# Altium PCB Board.PcbDoc
Units mil, origin at the board's own origin, x right, y up, seen from the top; angles counter-clockwise.
Board outline 5535.2 x 1035.2 mil, 2 copper layers (Top Layer, Bottom Layer); 64 components, 52 nets, 197 pads, 38 vias.
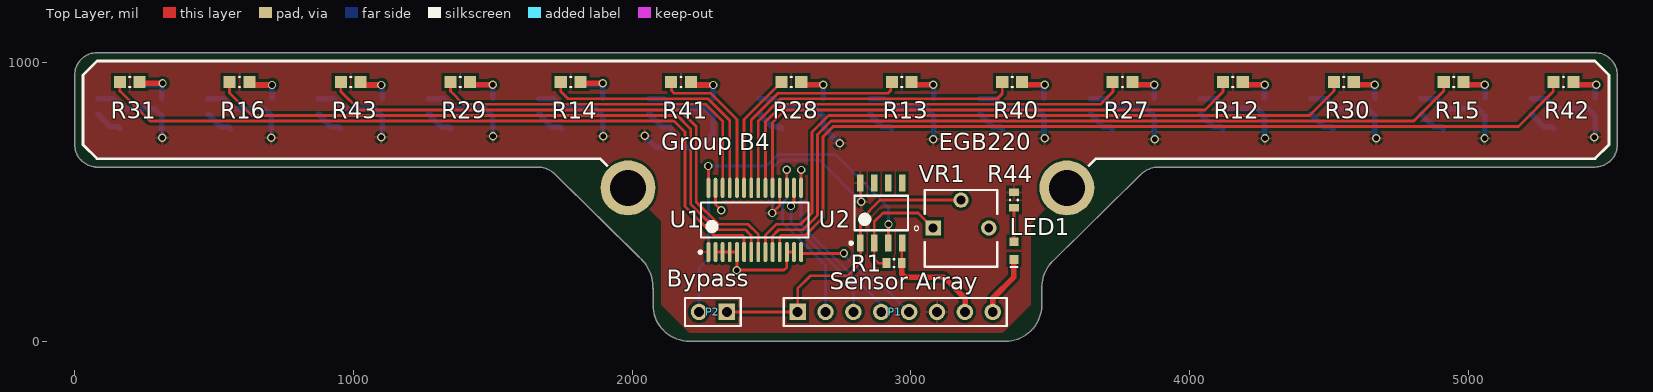
[diagram p0: Top Layer view]
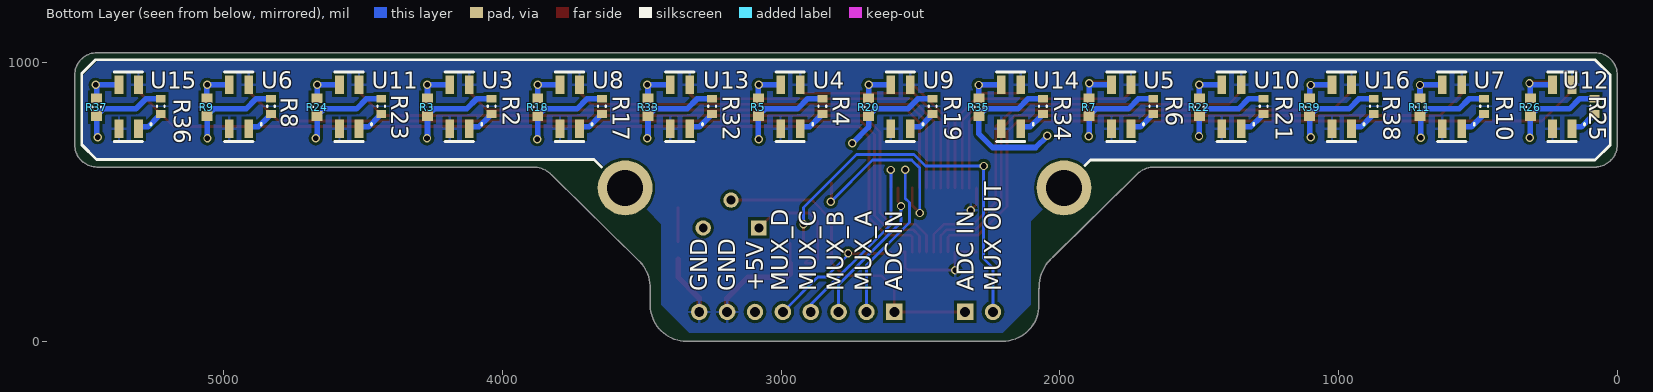
[diagram p1: Bottom Layer view, seen from below]

## Layer stack, top to bottom
Top Solder: solder mask 0.4, Solder Resist, Dk 3.5
Top Layer: signal copper 1.4
Dielectric 1: dielectric 12.6, FR-4, Dk 4.8
Bottom Layer: signal copper 1.4
Bottom Solder: solder mask 0.4, Solder Resist, Dk 3.5

## Board outline
1726.34,596.29 1726.36,596.28 cw(c1729.86,599.87) 1726.21,596.43 ccw(c1660,533.95) 1726.19,596.45 ccw(c1660,533.95) 1660,624.98 cw(c1660,630) 1659.6,625 75.18,625 cw(c75.18,630.01) 73.54,625.28 cw(c80.18,705.01) 0.44,698.37 cw(c5.18,700.01) 0.17,700.01 0.17,953.73 cw(c5.01,955.01) 0,955.01 cw(c80.18,955.01) 80.18,1035.2 cw(c80.18,1030.18) 81.46,1035.03 5455.18,1035.03 cw(c5455.18,955.01) 5535.2,955.01 5535.2,705.01 cw(c5455.18,705.01) 5455.18,625 3890.39,625 cw(c3890,630) 3890,624.99 ccw(c3890,533.95) 3824.02,596.67 cw(c3820.39,600.13) 3822.83,595.75 3508.52,286.43 cw(c3505,290) 3507.98,285.97 ccw(c3605.46,192.59) 3470.65,199.56 3470.65,185.62 ccw(c3605.46,192.59) 3470.67,185.32 cw(c3465.66,185.05) 3470.67,185.05 cw(c3465.66,185.05) 3470.65,184.57 3470.65,130.01 cw(c3465.64,130.01) 3470.18,127.89 cw(c3340.18,130.01) 3340.18,0 2205.18,0 cw(c2205.18,130.01) 2075.17,130.01 2075.1,188.94 cw(c2080,190) 2074.99,190.13 ccw(c1933.05,193.71) 2075.03,193.71 ccw(c1933.05,193.71) 2026.31,300.77 cw(c2029.61,304.55) 2025.59,301.55 1726.36,596.28 1726.34,596.29 cw(c1729.86,599.87)

## Design rules (kind name [scope] priority, off if disabled: settings)
Clearance [All] p1: gap=10 ignorepadtopadclearanceinfootprint=FALSE except(0: Arc-Hole Track-Hole SMDPad-Hole THPad-Hole Via-Hole Fill-Hole Poly-Hole Region-Hole Text-Hole)
PolygonConnect [All] p1: connectstyle=Relief reliefconductorwidth=10 reliefentries=4 polygonreliefangle="90 Angle" airgapwidth=10
RoutingVias [All] p1: holewidth=20 width=30 viastyle="Through Hole" minholewidth=20 minwidth=30 maxholewidth=20 maxwidth=30
SolderMaskExpansion [All] p1: expansion=4
Width [All] p1: maxlimit=40 minlimit=10 preferedwidth=20 minimp=50.000000 maximp=50.000000 favimp=50.000000
30 further rules are at their usual default settings.

## Classes and differential pairs
component class Sensors: R2 R3 R4 R5 R6 R7 R8 R9 R10 R11 R12 R13 R14 R15 R16 R17 R18 R19 R20 R21 R22 R23 R24 R25 R26 R27 R28 R29 R30 R31 R32 R33 R34 R35 R36 R37 R38 R39 R40 R41 R42 R43 U3 U4 U5 U6 U7 U8 U9 U10 U11 U12 U13 U14 U15 U16
component class Control: LED1 P1 R1 R44 U1 U2 VR1

## Components (designator, comment, footprint, x,y, rotation, side; value= is the part's Value field where it differs from the comment)
LED1 "2V 20mA 0603 Red" 0603_A 3370.18,325.01 r90 top
P1 "CONTROLBOARD" HDR1X8 2594.16,105.02 r0 top
P2 "AMP BYPASS" HDR1X2 2340.18,105.02 r180 top
R1 "6K2 5% 0603(1608)" RESC0603(1608)_L 2940.18,280.01 r180 top value="6200.00 Ohm"
R2 "200R 5%" RESC0603(1608)_L 4039.42,842.57 r90 bottom value="200.00 Ohm"
R3 "22R 5%" RESC0603(1608)_N 4269.42,840.13 r270 bottom value="22.00 Ohm"
R4 "200R 5%" RESC0603(1608)_L 2852.27,842.57 r90 bottom value="200.00 Ohm"
R5 "22R 5%" RESC0603(1608)_N 3082.27,840.13 r270 bottom value="22.00 Ohm"
R6 "200R 5%" RESC0603(1608)_L 1665.12,842.57 r90 bottom value="200.00 Ohm"
R7 "22R 5%" RESC0603(1608)_N 1895.12,840.13 r270 bottom value="22.00 Ohm"
R8 "200R 5%" RESC0603(1608)_L 4830.85,842.57 r90 bottom value="200.00 Ohm"
R9 "22R 5%" RESC0603(1608)_N 5060.85,840.13 r270 bottom value="22.00 Ohm"
R10 "200R 5%" RESC0603(1608)_L 477.97,842.57 r90 bottom value="200.00 Ohm"
R11 "22R 5%" RESC0603(1608)_N 707.97,840.13 r270 bottom value="22.00 Ohm"
R12 "220R 5%" RESC0603(1608)_M 4155.87,930.02 r180 top value="220.00 Ohm"
R13 "220R 5%" RESC0603(1608)_M 2967.66,930.02 r180 top value="220.00 Ohm"
R14 "220R 5%" RESC0603(1608)_M 1779.46,930.02 r180 top value="220.00 Ohm"
R15 "220R 5%" RESC0603(1608)_M 4948.01,930.02 r180 top value="220.00 Ohm"
R16 "220R 5%" RESC0603(1608)_M 591.25,930.02 r180 top value="220.00 Ohm"
R17 "200R 5%" RESC0603(1608)_L 3643.7,842.57 r90 bottom value="200.00 Ohm"
R18 "22R 5%" RESC0603(1608)_N 3873.7,840.13 r270 bottom value="22.00 Ohm"
R19 "200R 5%" RESC0603(1608)_L 2456.55,842.57 r90 bottom value="200.00 Ohm"
R20 "22R 5%" RESC0603(1608)_N 2686.55,840.13 r270 bottom value="22.00 Ohm"
R21 "200R 5%" RESC0603(1608)_L 1269.4,842.57 r90 bottom value="200.00 Ohm"
R22 "22R 5%" RESC0603(1608)_N 1499.4,840.13 r270 bottom value="22.00 Ohm"
R23 "200R 5%" RESC0603(1608)_L 4435.14,842.57 r90 bottom value="200.00 Ohm"
R24 "22R 5%" RESC0603(1608)_N 4665.14,840.13 r270 bottom value="22.00 Ohm"
R25 "200R 5%" RESC0603(1608)_L 82.25,842.57 r90 bottom value="200.00 Ohm"
R26 "22R 5%" RESC0603(1608)_N 312.25,840.13 r270 bottom value="22.00 Ohm"
R27 "220R 5%" RESC0603(1608)_M 3759.8,930.02 r180 top value="220.00 Ohm"
R28 "220R 5%" RESC0603(1608)_M 2571.59,930.02 r180 top value="220.00 Ohm"
R29 "220R 5%" RESC0603(1608)_M 1383.39,930.02 r180 top value="220.00 Ohm"
R30 "220R 5%" RESC0603(1608)_M 4554.08,930.02 r180 top value="220.00 Ohm"
R31 "220R 5%" RESC0603(1608)_M 197.32,930.02 r180 top value="220.00 Ohm"
R32 "200R 5%" RESC0603(1608)_L 3247.99,842.57 r90 bottom value="200.00 Ohm"
R33 "22R 5%" RESC0603(1608)_N 3477.99,840.13 r270 bottom value="22.00 Ohm"
R34 "200R 5%" RESC0603(1608)_L 2060.84,842.57 r90 bottom value="200.00 Ohm"
R35 "22R 5%" RESC0603(1608)_N 2290.84,840.13 r270 bottom value="22.00 Ohm"
R36 "200R 5%" RESC0603(1608)_L 5226.57,842.57 r90 bottom value="200.00 Ohm"
R37 "22R 5%" RESC0603(1608)_N 5456.57,840.13 r270 bottom value="22.00 Ohm"
R38 "200R 5%" RESC0603(1608)_L 873.69,842.57 r90 bottom value="200.00 Ohm"
R39 "22R 5%" RESC0603(1608)_N 1103.69,840.13 r270 bottom value="22.00 Ohm"
R40 "220R 5%" RESC0603(1608)_M 3363.73,930.02 r180 top value="220.00 Ohm"
R41 "220R 5%" RESC0603(1608)_M 2175.53,930.02 r180 top value="220.00 Ohm"
R42 "220R 5%" RESC0603(1608)_M 5341.94,930.02 r180 top value="220.00 Ohm"
R43 "220R 5%" RESC0603(1608)_M 990.18,930.01 r180 top value="220.00 Ohm"
R44 "150R 5% 0603(1608)" RESC0603(1608)_L 3370.18,506.39 r90 top value="150.00 Ohm"
U1 "ADG706BRUZ-REEL" ADI-RU-28_M 2440.18,435.01 r90 top
U2 "LM358DR2G" ONSC-SOIC-8-751-07_V 2894.16,460.01 r90 top
U3 "QRE1113" QRE1113GR 4154.42,841.17 r270 bottom
U4 "QRE1113" QRE1113GR 2967.27,841.17 r270 bottom
U5 "QRE1113" QRE1113GR 1780.12,841.17 r270 bottom
U6 "QRE1113" QRE1113GR 4945.85,841.17 r270 bottom
U7 "QRE1113" QRE1113GR 592.97,841.17 r270 bottom
U8 "QRE1113" QRE1113GR 3758.7,841.17 r270 bottom
U9 "QRE1113" QRE1113GR 2571.55,841.17 r270 bottom
U10 "QRE1113" QRE1113GR 1384.4,841.17 r270 bottom
U11 "QRE1113" QRE1113GR 4550.14,841.17 r270 bottom
U12 "QRE1113" QRE1113GR 197.25,841.17 r270 bottom
U13 "QRE1113" QRE1113GR 3362.99,841.17 r270 bottom
U14 "QRE1113" QRE1113GR 2175.84,841.17 r270 bottom
U15 "QRE1113" QRE1113GR 5341.57,841.17 r270 bottom
U16 "QRE1113" QRE1113GR 988.69,841.17 r270 bottom
VR1 "3362P-1-205LF" *TRIM_3362P-1-205LF 3180.18,405.01 r0 top

## Footprints (in the part's own frame and the unit in brackets; to place one, negate y for a bottom-side part, rotate by r counter-clockwise, add the part's x,y. Pads: shape width x height; smd on the part's side, far side on the other; paste and mask are expansions set on the pad)
0603_A [mm] "Chip LED, 2-Leads, Body 1.6x0.8mm, IPC Medium Density"
  rect 0.8x0.8 smd: 1(-0.8,0) 2(0.8,0)
  silkscreen extent -1.5,-0.3 -1.5,0.3, body extent -0.8,-0.4 0.8,0.4, height 0.7
*TRIM_3362P-1-205LF [mm]
  rect 1.4x1.4 hole 0.8: 1(-2.54,0.035)
  round 1.4 hole 0.8: 2(0,2.575) 3(2.54,0.035)
  silkscreen extent -4.27,-3.49 3.3,3.49
ADI-RU-28_M [mm] "SOP, 28-Leads, Body 9.7x4.4mm, Pitch 0.65mm, IPC Low Density"
  oval 1.85x0.35 smd: 1(-2.925,4.225) 2(-2.925,3.575) 3(-2.925,2.925) 4(-2.925,2.275) 5(-2.925,1.625) 6(-2.925,0.975) 7(-2.925,0.325) 8(-2.925,-0.325) 9(-2.925,-0.975) 10(-2.925,-1.625) 11(-2.925,-2.275) 12(-2.925,-2.925) 13(-2.925,-3.575) 14(-2.925,-4.225) 15(2.925,-4.225) 16(2.925,-3.575) 17(2.925,-2.925) 18(2.925,-2.275) 19(2.925,-1.625) 20(2.925,-0.975) 21(2.925,-0.325) 22(2.925,0.325) 23(2.925,0.975) 24(2.925,1.625) 25(2.925,2.275) 26(2.925,2.925) 27(2.925,3.575) 28(2.925,4.225)
  silkscreen extent -3.05,-4.9 1.6,5.07, body extent -2.25,-4.9 2.25,4.9, height 1.2
HDR1X2 [mm] "Connector; Header; 2 Position"
  rect 1.5x1.5 hole 0.9: 1(0,0)
  round 1.5 hole 0.9: 2(2.54,0)
  silkscreen extent -1.27,-1.27 3.81,1.27
HDR1X8 [mm] "Connector; Header; 8 Position"
  rect 1.5x1.5 hole 0.9: 1(0,0)
  round 1.5 hole 0.9: 2(2.54,0) 3(5.08,0) 4(7.62,0) 5(10.16,0) 6(12.7,0) 7(15.24,0) 8(17.78,0)
  silkscreen extent -1.27,-1.27 19.05,1.27
ONSC-SOIC-8-751-07_V [mm] "SOIC, 8-Leads, Body 4.9x3.9mm, Pitch 1.27mm"
  rect 1.52x0.6 smd: 1(-2.74,1.905) 2(-2.74,0.635) 3(-2.74,-0.635) 4(-2.74,-1.905) 5(2.74,-1.905) 6(2.74,-0.635) 7(2.74,0.635) 8(2.74,1.905)
  silkscreen extent -2.86,-2.45 1.58,2.88, body extent -1.95,-2.45 1.95,2.45, height 1.75
QRE1113GR [mm] "Miniature Reflective Object Sensor"
  rect 1.66x0.79 smd: 1(2,0.889) 2(-2,0.889) 3(-2,-0.889) 4(2,-0.889)
  silkscreen extent -3.18,-1.32 3.18,2.03, body extent -1.35,-1.78 1.35,1.78, height 1.6
RESC0603(1608)_L [mm] "Chip Resistor, Body 1.6x0.8mm, IPC High Density"
  rect 0.7x0.9 smd: 1(-0.7,0) 2(0.7,0)
  silkscreen extent -0.05,-0.35 0.05,0.35, body extent -0.85,-0.47 0.85,0.47, height 0.6
RESC0603(1608)_M [mm] "Chip Resistor, Body 1.6x0.8mm, IPC Low Density"
  rect 1.1x1.1 smd: 1(-0.9,0) 2(0.9,0)
  silkscreen extent -0.05,-0.45 0.05,0.45, body extent -0.85,-0.47 0.85,0.47, height 0.6
RESC0603(1608)_N [mm] "Chip Resistor, Body 1.6x0.8mm, IPC Medium Density"
  rect 0.9x1 smd: 1(-0.8,0) 2(0.8,0)
  silkscreen extent -0.05,-0.4 0.05,0.4, body extent -0.85,-0.47 0.85,0.47, height 0.6

## Part data
LED1: library part CMP-1426-00001-1, "SMD mono-color Chip LED, WL-SMCW, Red", Color=Red, Manufacturer="Wuerth Elektronik", PartNumber=150060RS75000, ComponentLink1Description="Manufacturer URL", ComponentLink1URL=http://www.we-online.com, ComponentLink2Description=Datasheet, ComponentLink2URL=http://katalog.we-online.com/led/datasheet/150060RS75000.pdf, PackageReference=0603_A
P1: library part "Header 8", "Header, 8-Pin", LatestRevisionDate=17-Jul-2002, LatestRevisionNote="Re-released for DXP Platform.", Publisher="Altium Limited"
P2: library part "Header 2", "Header, 2-Pin", LatestRevisionDate=17-Jul-2002, LatestRevisionNote="Re-released for DXP Platform.", Publisher="Altium Limited"
R1: library part CMP-1012-00093-1, "6K2 0.1W 5% 0603 (1608 Metric)  SMD", Case-EIA=0603, Case-Metric=1608, Power="0.1 W", Tolerance="5 %", Technology=SMT
R2 R4 R6 R8 R10 R17 R19 R21 R23 R25 R32 R34 R36 R38: library part CMP-1012-00057-1, "200R 0.1W 5% 0603 (1608 Metric)  SMD", Case-EIA=0603, Case-Metric=1608, Power="0.1 W", Tolerance="5 %", Technology=SMT
R3 R5 R7 R9 R11 R18 R20 R22 R24 R26 R33 R35 R37 R39: library part CMP-1012-00034-1, "22R 0.1W 5% 0603 (1608 Metric)  SMD", Case-EIA=0603, Case-Metric=1608, Power="0.1 W", Tolerance="5 %", Technology=SMT
R12 R13 R14 R15 R16 R27 R28 R29 R30 R31 R40 R41 R42 R43: library part CMP-1012-00058-1, "220R 0.1W 5% 0603 (1608 Metric)  SMD", Case-EIA=0603, Case-Metric=1608, Power="0.1 W", Tolerance="5 %", Technology=SMT
R44: library part CMP-1012-00054-1, "150R 0.1W 5% 0603 (1608 Metric)  SMD", Case-EIA=0603, Case-Metric=1608, Power="0.1 W", Tolerance="5 %", Technology=SMT
U1: library part CMP-0798-00220-1, "1.8 to 5.5 V / 2.5 V, CMOS Low-Voltage 2.5 Ohm, 16-Channel Multiplexer, -40 to 85 degC, 28-pin SOP (RU-28), Reel", Manufacturer="Analog Devices", Bandwidth (Hz)=25M, Code_JEDEC=MO-153-AE, ComponentLink1Description="Manufacturer URL", ComponentLink1URL=http://www.analog.com/en/index.html, ComponentLink2Description=Datasheet, ComponentLink2URL=http://www.analog.com/static/imported-files/data_sheets/ADG706_707.pdf, ComponentLink3Description="Package Specification", ComponentLink3URL=http://www.analog.com/static/imported-files/packages/249854663RU_28.pdf, DatasheetVersion="Rev. A", Max Analog Signal Range="Vss to Vdd", Mounting Technology="Surface Mount", PackageDescription="28-Pin Thin Shrink Small Outline Package, Body 9.7 x 4.4 mm, Pitch 0.65 mm", PackageReference=RU-28, PackageVersion=Mar-05, Packing=Reel, PartNumber=ADG706BRUZ-REEL, Ron (ohms)=2.5, Supply V Guar Performance="Dual_(+/-2.5V), Single_(+3V), Single_(+5V)", t transition (s)=40n
U2: library part CMP-1310-00291-1, "Single Supply Dual Operational Amplifier, 3 to 32 V, 0 to 70 degC, 8-Pin SOIC, Pb-Free, Tape and Reel", Manufacturer="On Semiconductor", ComponentLink1Description="Manufacturer URL", ComponentLink1URL=http://www.onsemi.com/, ComponentLink2Description=Datasheet, ComponentLink2URL=http://www.onsemi.cn/pub_link/Collateral/LM358-D.PDF, ComponentLink3Description="Package Specification", ComponentLink3URL=http://www.onsemi.com/pub_link/Collateral/751-07.PDF, DatasheetVersion="Rev. 27", Mounting Technology="Surface Mount", PackageDescription="8-Pin Small Outline Integrated Circuit, Body 4.9 x 3.9 mm, Pitch 1.27 mm", PackageReference=SOIC-8-751-07, PackageVersion="Rev. AK, 02/2011", Packing="Tape and Reel", PartNumber=LM358DR2G, RoHS=TRUE, VCC Max (V)=32, VCC Min (V)=3
VR1: "Res Cermet Trimmer 2M Ohm 10% 1/2W 1_Elec_/1_Mech_Turn 2.77mm _6.6 X 6.99 X 4.7mm_ Pin Thru-Hole Tube", Package="2220 Bourns", Availability=Unavailable, MF=Bourns, MP=3362P-1-205LF, Price=None, SnapEDA_Link=https://www.snapeda.com/parts/3362P-1-205LF/Bourns%20-%20J.W.%20Miller/view-part/?ref=snap

## Free pads (board coordinates)
  round 196.85 hole 130 unplated: M3(1985.38,550.01) M3(3560.18,550.01)

## Via types
v1: diameter 30, hole 20, Top Layer to Bottom Layer, 38 vias

## Nets (pads, with @x,y where several pads share a name; then routed paths per layer and width w, separated by ;. In a path a pad name is that pad's centre, name@x,y a point inside that pad or via, vN(x,y) a via of type N, cw(c..) or ccw(c..) an arc to the next point about the centre after c; other vN are vias at no path point)
+5: P1.6 R2.2 R3.2 R4.2 R5.2 R6.2 R7.2 R8.2 R9.2 R10.2 R11.2 R17.2 R18.2 R19.2 R20.2 R21.2 R22.2 R23.2 R24.2 R25.2 R26.2 R32.2 R33.2 R34.2 R35.2 R36.2 R37.2 R38.2 R39.2 R44.2 U1.1 U1.18 U2.8 | length 5541.5
  Top Layer w10: v1(2502.72,460.01) 2529.75,487.05 U1.18 ; U2.8 2819.16,503.21 v1(2822.35,500.01)
  Bottom Layer w10: v1(2502.72,460.01) 2502.72,620.79 2531.94,650.01 2672.35,650.01 v1(2822.35,500.01)
  Bottom Layer w20: R25.2 135.52,870.13 171.74,833.91 286.98,833.91 R26.2@302.57,818.32 ; R26.2 312.25,731.79 v1(314.03,730.01) ; R10.2 531.23,870.13 567.45,833.91 682.69,833.91 R11.2@698.28,818.32 ; v1(705.18,730.01) 705.18,805.85 R11.2 ; R38.2 926.95,870.13 963.17,833.91 1078.41,833.91 R39.2@1094,818.32 ; v1(1099.65,731.79) 1103.69,735.82 R39.2 ; R21.2 1322.67,870.13 1358.89,833.91 1474.13,833.91 R22.2@1489.72,818.32 ; R22.2 1499.4,737.46 v1(1501.04,735.82) ; R6.2 1718.38,870.13 1754.6,833.91 1869.84,833.91 R7.2@1885.43,818.32 ; R7.2 1895.12,736.66 v1(1896.76,735.01) ; v1(2045.18,736.79) 2086.96,695.01 2241.67,695.01 2290.84,744.18 R35.2 ; R34.2 2114.1,870.13 2150.32,833.91 2265.56,833.91 R35.2@2281.15,818.32 ; R19.2 2509.82,870.13 2546.04,833.91 2661.28,833.91 R20.2@2676.87,818.32 ; R20.2 2686.55,768.64 v1(2745.18,710.01) ; R4.2 2905.53,870.13 2941.75,833.91 3056.99,833.91 R5.2@3072.59,818.32 ; v1(3080.18,725.01) 3080.18,727.72 3082.27,729.81 R5.2 ; R32.2 3301.25,870.13 3337.47,833.91 3452.71,833.91 R33.2@3468.3,818.32 ; R33.2 3477.99,729.92 v1(3480.18,727.72) ; R17.2 3696.97,870.13 3733.19,833.91 3848.43,833.91 R18.2@3864.02,818.32 ; R18.2 3873.7,726.49 v1(3875.18,725.01) ; R2.2 4092.68,870.13 4128.9,833.91 4244.15,833.91 R3.2@4259.74,818.32 ; R3.2 4269.42,729.36 v1(4271.06,727.72) ; R23.2 4488.4,870.13 4524.62,833.91 4639.86,833.91 R24.2@4655.45,818.32 ; R24.2 4665.14,732.77 v1(4670.18,727.72) ; R8.2 4884.12,870.13 4920.34,833.91 5035.58,833.91 R9.2@5051.17,818.32 ; v1(5058.89,727.72) 5058.89,806.67 R9.2 ; R36.2 5279.83,870.13 5316.05,833.91 5431.3,833.91 R37.2@5446.89,818.32 ; v1(5452.68,731.79) 5452.68,734.5 5456.57,738.39 R37.2
GND: LED1.1 P1.7 P1.8 R1.1 U1.2 U1.3 U1.4 U1.5 U1.12 U1.13 U1.27 U2.4 U3.2 U3.4 U4.2 U4.4 U5.2 U5.4 U6.2 U6.4 U7.2 U7.4 U8.2 U8.4 U9.2 U9.4 U10.2 U10.4 U11.2 U11.4 U12.2 U12.4 U13.2 U13.4 U14.2 U14.4 U15.2 U15.4 U16.2 U16.4 | length 1139.9
  Top Layer w10: U1.2 U1.3 U1.4 U1.5 2376.21,256.04 v1(2375.18,255.01) 2545.34,255.01 2555.34,265.01 U1.12 U1.13 ; U1.27 2299.43,490.52 v1(2320.18,469.77) ; R1.1 2967.74,350.72 U2.4
  Top Layer w20: R1.1 2967.74,241.73 2979.46,230.01 3119.16,230.01 3195.18,153.99 3195.18,106.04 P1.7 ; P1.8 3294.16,153.99 3370.18,230.01 LED1.1
MUX_OUTPUT: P2.2 U1.28 U2.3 | length 1486.6
  Top Layer w10: U1.28 v1(2273.84,628.68) ; U2.3 2920.18,353.16 v1(2920.18,420.01)
  Bottom Layer w10: P2.2 2240.18,262.69 2273.84,296.35 v1(2273.84,628.68) 2482.32,628.68 2523.66,670.01 2730.18,670.01 2920.18,480.01 v1(2920.18,420.01)
NetLED1_2: LED1.2 R44.1 | length 122.3
  Top Layer w10: LED1.2 R44.1
NetR1_2: R1.2 U2.2 VR1.1 | length 446.1
  Top Layer w10: R1.2@2903.84,292.73 2912.62,283.95 R1.2 2884.12,280.01 2869.16,294.98 U2.2 2869.16,428.99 2900.18,460.01 3026.56,460.01 VR1.1
NetR2_1: R2.1 U3.1 | length 104.6
  Bottom Layer w20: R2.1 4043.36,815.02 4047.14,811.24 4047.14,807.3 4085.59,768.85 4113.87,768.85 4119.42,763.3 U3.1
NetR3_1: R3.1 R12.1 U3.3 | length 212.4
  Top Layer w20: R12.1 4201.3,920.01 v1(4270.18,920.01)
  Bottom Layer w20: U3.3 v1@4270.08,919.91 ; R3.1 4269.42,919.25 v1@4270.08,919.91 ; v1(4270.18,920.01) v1@4270.08,919.91
NetR4_1: R4.1 U4.1 | length 104.6
  Bottom Layer w20: R4.1 2856.21,815.02 2859.99,811.24 2859.99,807.3 2898.43,768.85 2926.72,768.85 2932.27,763.3 U4.1
NetR5_1: R5.1 R13.1 U4.3 | length 208.4
  Top Layer w20: R13.1 3013.1,920.01 v1(3080.18,920.01)
  Bottom Layer w20: U4.3 3080.08,919.91 v1(3080.18,920.01) 3080.18,917.31 3082.27,915.22 R5.1
NetR6_1: R6.1 U5.1 | length 104.6
  Bottom Layer w20: R6.1 1669.06,815.02 1672.84,811.24 1672.84,807.3 1711.28,768.85 1739.57,768.85 1745.12,763.3 U5.1
NetR7_1: R7.1 R14.1 U5.3 | length 217.9
  Top Layer w20: R14.1 1819.89,925.01 v1(1895.18,925.01)
  Bottom Layer w20: U5.3 1890.08,919.91 v1@1895.12,924.95 ; R7.1 v1@1895.12,924.95 ; v1(1895.18,925.01) v1@1895.12,924.95
NetR8_1: R8.1 U6.1 | length 104.6
  Bottom Layer w20: R8.1 4834.79,815.02 4838.57,811.24 4838.57,807.3 4877.02,768.85 4905.3,768.85 4910.85,763.3 U6.1
NetR9_1: R9.1 R15.1 U6.3 | length 208.9
  Top Layer w20: R15.1 4993.44,920.01 v1(5060.18,920.01)
  Bottom Layer w20: U6.3 5060.08,919.91 v1(5060.18,920.01) 5060.85,919.34 R9.1
NetR10_1: R10.1 U7.1 | length 104.6
  Bottom Layer w20: R10.1 481.91,815.02 485.69,811.24 485.69,807.3 524.13,768.85 552.42,768.85 557.97,763.3 U7.1
NetR11_1: R11.1 R16.1 U7.3 | length 213.7
  Top Layer w20: R16.1 637.32,919.38 v1(707.97,919.38)
  Bottom Layer w20: U7.3 707.44,919.91 v1(707.97,919.38) R11.1
NetR17_1: R17.1 U8.1 | length 104.6
  Bottom Layer w20: R17.1 3647.64,815.02 3651.42,811.24 3651.42,807.3 3689.87,768.85 3718.15,768.85 3723.7,763.3 U8.1
NetR18_1: R18.1 R27.1 U8.3 | length 211
  Top Layer w20: R27.1 3805.23,920.01 v1(3873.7,920.01)
  Bottom Layer w20: U8.3 3873.6,919.91 v1(3873.7,920.01) R18.1
NetR19_1: R19.1 U9.1 | length 104.6
  Bottom Layer w20: R19.1 2460.49,815.02 2464.27,811.24 2464.27,807.3 2502.72,768.85 2531,768.85 2536.55,763.3 U9.1
NetR20_1: R20.1 R28.1 U9.3 | length 212.1
  Top Layer w20: R28.1 2617.03,920.01 v1(2686.55,920.01)
  Bottom Layer w20: U9.3 2686.45,919.91 v1(2686.55,920.01) R20.1
NetR21_1: R21.1 U10.1 | length 104.6
  Bottom Layer w20: R21.1 1273.34,815.02 1277.12,811.24 1277.12,807.3 1315.57,768.85 1343.85,768.85 1349.4,763.3 U10.1
NetR22_1: R22.1 R29.1 U10.3 | length 213.2
  Top Layer w20: R29.1 1428.82,920.01 v1(1499.4,920.01)
  Bottom Layer w20: U10.3 1499.3,919.91 v1(1499.4,920.01) R22.1
NetR23_1: R23.1 U11.1 | length 104.6
  Bottom Layer w20: R23.1 4439.07,815.02 4442.85,811.24 4442.85,807.3 4481.3,768.85 4509.59,768.85 4515.14,763.3 U11.1
NetR24_1: R24.1 R30.1 U11.3 | length 208.2
  Top Layer w20: R30.1 4599.51,920.01 v1(4665.18,920.01)
  Bottom Layer w20: U11.3 4665.08,919.91 v1@4665.14,919.97 ; R24.1 v1@4665.14,919.97 ; v1(4665.18,920.01) v1@4665.14,919.97
NetR25_1: R25.1 U12.1 | length 104.6
  Bottom Layer w20: R25.1 86.19,815.02 89.97,811.24 89.97,807.3 128.42,768.85 156.7,768.85 162.25,763.3 U12.1
NetR26_1: R26.1 R31.1 U12.3 | length 224.1
  Top Layer w20: R31.1 237.75,925.01 v1(315.18,925.01)
  Bottom Layer w20: U12.3 310.08,919.91 v1(315.18,925.01) 315.18,922.31 312.25,919.38 R26.1
NetR32_1: R32.1 U13.1 | length 104.6
  Bottom Layer w20: R32.1 3251.92,815.02 3255.7,811.24 3255.7,807.3 3294.15,768.85 3322.44,768.85 3327.99,763.3 U13.1
NetR33_1: R33.1 R40.1 U13.3 | length 216.7
  Top Layer w20: R40.1 3409.16,920.01 v1(3480.18,920.01)
  Bottom Layer w20: U13.3 3480.08,919.91 v1(3480.18,920.01) 3480.18,917.31 3477.99,915.11 R33.1
NetR34_1: R34.1 U14.1 | length 104.6
  Bottom Layer w20: R34.1 2064.77,815.02 2068.55,811.24 2068.55,807.3 2107,768.85 2135.29,768.85 2140.84,763.3 U14.1
NetR35_1: R35.1 R41.1 U14.3 | length 212.3
  Top Layer w20: R41.1 2221.59,919.38 v1(2290.84,919.38)
  Bottom Layer w20: U14.3 2290.31,919.91 v1(2290.84,919.38) R35.1
NetR36_1: R36.1 U15.1 | length 104.6
  Bottom Layer w20: R36.1 5230.51,815.02 5234.29,811.24 5234.29,807.3 5272.74,768.85 5301.02,768.85 5306.57,763.3 U15.1
NetR37_1: R37.1 R42.1 U15.3 | length 220.5
  Top Layer w20: R42.1 5387.37,920.01 v1(5460.18,920.01)
  Bottom Layer w20: U15.3 5460.08,919.91 v1(5460.18,920.01) 5460.18,917.31 5456.57,913.7 R37.1
NetR38_1: R38.1 U16.1 | length 104.6
  Bottom Layer w20: R38.1 877.62,815.02 881.4,811.24 881.4,807.3 919.85,768.85 948.13,768.85 953.69,763.3 U16.1
NetR39_1: R39.1 R43.1 U16.3 | length 204.9
  Top Layer w20: R43.1 1036.25,919.38 v1(1100.18,919.38)
  Bottom Layer w20: U16.3 1099.65,919.91 v1(1100.18,919.38) 1100.18,916.67 1103.69,913.17 R39.1
SENS_1: R12.2 U1.19 | length 1931.5
  Top Layer w10: U1.19 2504.16,784.87 2549.3,830.01 4055.18,830.01 4120.44,895.27 R12.2
SENS_2: R27.2 U1.20 | length 1563.9
  Top Layer w10: U1.20 2478.57,787.57 2541.01,850.01 3680.18,850.01 3725.18,895.01 3725.18,929.2 R27.2
SENS_3: R40.2 U1.21 | length 1197.8
  Top Layer w10: U1.21 2452.98,790.26 2532.73,870.01 3310.18,870.01 3328.3,888.13 R40.2
SENS_4: R13.2 U1.22 | length 820.2
  Top Layer w10: U1.22 2427.39,792.96 2524.45,890.01 2919.16,890.01 2928.36,899.22 2928.36,926.15 R13.2
SENS_5: R28.2 U1.23 | length 435.7
  Top Layer w10: U1.23 2401.53,550.44 2401.53,795.38 R28.2
SENS_6: R41.2 U1.24 | length 554.4
  Top Layer w10: R41.2 2140.98,929.13 2140.98,899.22 2150.18,890.01 2281.21,890.01 2376.21,795.01 U1.24
SENS_7: R14.2 U1.25 | length 931
  Top Layer w10: R14.2 1740.18,926.17 1744.02,926.17 1744.02,896.17 1770.18,870.01 2272.92,870.01 2350.61,792.32 U1.25
SENS_8: R29.2 U1.26 | length 1293.9
  Top Layer w10: R29.2 1347.95,897.24 1395.18,850.01 2264.64,850.01 2325.02,789.63 U1.26
SENS_9: R42.2 U1.11 | length 3250.9
  Top Layer w10: U1.11 2529.75,374.16 2535.61,380.01 2621.75,380.01 2685.18,443.45 2685.18,733.45 2721.75,770.01 5180.18,770.01 5305.18,895.01 5305.18,928.69 R42.2
SENS_10: R15.2 U1.10 | length 2883.9
  Top Layer w10: U1.10 2504.16,377.91 2526.26,400.01 2613.47,400.01 2665.18,451.73 2665.18,741.73 2713.47,790.01 4804.71,790.01 4912.57,897.88 R15.2
SENS_11: R30.2 U1.9 | length 2516.7
  Top Layer w10: U1.9 2478.57,380.61 2517.98,420.01 2605.18,420.01 2645.18,460.01 2645.18,750.01 2705.18,810.01 4430.18,810.01 4518.64,898.48 R30.2
SENS_12: R43.2 U1.8 | length 1965.2
  Top Layer w10: R43.2 954.75,896.61 1021.34,830.01 2170.18,830.01 2230.18,770.01 2230.18,500.01 2310.18,420.01 2415.18,420.01 2452.98,382.22 U1.8
SENS_13: R16.2 U1.7 | length 2341.2
  Top Layer w10: R16.2 555.18,929.38 555.18,890.87 636.04,810.01 2161.9,810.01 2210.18,761.73 2210.18,491.73 2301.9,400.01 2406.9,400.01 2427.39,379.53 U1.7
SENS_14: R31.2 U1.6 | length 2699.2
  Top Layer w10: R31.2 161.89,898.31 270.18,790.01 2150.18,790.01 2190.18,750.01 2190.18,483.45 2293.61,380.01 2395.94,380.01 2401.8,374.16 U1.6
SENS_ADC: P1.1 P2.1 U2.1 VR1.2 | length 1146.5
  Top Layer w10: P2.1 P1.1 2594.16,188.99 2640.18,235.01 2774.16,235.01 2819.16,280.01 U2.1 2819.16,435.37 2890.18,506.39 VR1.2
SENS_MUX_A: P1.2 U1.17 | length 644.9
  Top Layer w10: v1(2555.18,615.01) 2555.34,614.86 U1.17
  Bottom Layer w10: v1(2555.18,615.01) 2555.18,512.44 2540.18,497.44 2540.18,426.35 2694.16,272.38 P1.2
SENS_MUX_B: P1.3 U1.16 | length 542.4
  Top Layer w10: v1(2570.18,485.01) 2570.18,490.12 2580.93,500.87 U1.16
  Bottom Layer w10: v1(2570.18,485.01) 2570.18,426.73 2794.16,202.75 P1.3
SENS_MUX_C: P1.4 U1.15 | length 693
  Top Layer w10: U1.15 v1(2606.52,614.51)
  Bottom Layer w10: v1(2606.52,614.51) 2606.52,418.68 2894.16,131.04 P1.4
SENS_MUX_D: P1.5 U1.14 | length 479.7
  Top Layer w10: U1.14 2611.36,315.01 v1(2760.18,315.01)
  Bottom Layer w10: v1(2760.18,315.01) 2760.18,309.7 2839.87,230.01 2869.16,230.01 P1.5
pads on no net: U2.5 U2.6 U2.7 VR1.3

## Polygon pours and split planes (outlines as drawn)
+5 on Top Layer "Top Layer-+5" (solid, pour order 2): 2105.18,430.21 1880.38,655.01 80.18,655.01 30.18,705.01 30.18,955.02 80.18,1005.02 5455.18,1005.01 5505.18,955.02 5505.18,705.02 5455.22,655.05 3665.2,655.03 3430.18,420.01 3430.18,130.01 3330.18,30.01 2205.12,30.02 2105.18,130.06
GND on Bottom Layer "Bottom Layer-GND" (solid, pour order 0): 2105.18,430.01 1880.18,655.01 80.18,655.01 30.18,705.01 30.18,955.01 80.18,1005.01 5455.18,1005.01 5505.18,955.02 5505.18,705.01 5455.18,655.01 3665.18,655.01 3430.18,420.01 3430.18,130.02 3330.18,30.02 2205.18,30.01 2105.18,130.01

## Silkscreen, mask and mechanical layers (free items; w line width, h text height)
Top Overlay:
  lines w10: 1910,630 1885,655 80,655 30,705 30,955 80,1005 5455,1005 5505,955 5505,705 5455,655 3665,655 3640,630
  text "Group B4" at 2105,685 h60
  text "EGB220" at 3100,685 h60
  text "Bypass" at 2125.18,195.01 h60
  text "Sensor Array" at 2710.18,185.01 h60
Bottom Overlay:
  lines w10: 1910,630 1890,650 80,650 25,705 25,955 80,1010 5455,1010 5460,1010 ; 3645,625 3672.5,652.5 5457.5,652.5 5510,705 5510,960 5460,1010 ; 5457.5,1010 5460,1010
  text "MUX OUT" at 2210,180 h60 r270
  text "ADC IN" at 2310,180 h60 r270
  text "ADC IN" at 2565,180 h60 r270
  text "MUX_A" at 2675,180 h60 r270
  text "MUX_B" at 2775,180 h60 r270
  text "MUX_C" at 2875,180 h60 r270
  text "MUX_D" at 2975,180 h60 r270
  text "+5V" at 3065,180 h60 r270
  text "GND" at 3165,180 h60 r270
  text "GND" at 3265,180 h60 r270
Mechanical 1:
  lines w10: 5.02,955.01 cw(c80.18,955.01) 80.18,1030.18 ; 5.18,700.01 5.18,955.18 ; 5.18,705.01 ccw(c80.18,705.01) 80.18,630.01 ; 75.18,630.01 1660,630.01 cw(c1660,533.95) 1729.86,599.87 2029.65,304.59 ; 80.02,1030.02 5455.18,1030.02 cw(c5455.18,955.01) 5530.18,955.01 5530.18,705.01 cw(c5455.18,705.01) 5455.18,630.01 3890,630.02 ccw(c3890,533.95) 3820.39,600.13 ; 2029.61,304.55 cw(c1933.05,193.71) 2080,190 ; 2080.11,190 2080.18,130.01 ccw(c2205.18,130.01) 2205.18,5.01 3340.18,5.01 ccw(c3340.18,130.01) 3465.18,130.01 ; 3465.64,130.01 3465.64,200.01 ; 3465.66,185.05 cw(c3605.46,192.59) 3510,295 ; 3505,290 3820,600